# EAGLE board schemat (EAGLE 8.2.2)

Size 100 x 80 mm. Coordinates in mm from the lower left corner, seen from the top.
Outline: 0,0 100,0 100,80 0,80 0,0
Copper layers (1*16): Top 0.035mm / dielectric 1.5mm / Bottom 0.035mm
Design rules "default": minimum track width 6mil, minimum drill 0.35mm, track to track 6mil, track to pad 6mil, pad to pad 6mil, via to via 6mil, smd to smd 6mil, copper to edge 40mil, drill to drill 6mil, minimum pad ring 10mil, minimum via ring 8mil, stop-mask expansion 4mil, vias tented up to drill 0mil, thermal gap 10mil

## Footprints (pad centres in the part's own frame; a part is rotated, then mirrored left to right if it is on the bottom)
E5-4 = drill 0.813 pad 1.905: + -2.54,0 | drill 0.813 pad 1.905 octagon: - 2.54,0
C050-025X075 = drill 0.813 octagon: 1 -2.54,0; 2 2.54,0
TUXGR_16X2_R2 = drill 1 pad 1.676: 1 -32,15.5; 2 -29.46,15.5; 3 -26.92,15.5; 4 -24.38,15.5; 5 -21.84,15.5; 6 -19.3,15.5; 7 -16.76,15.5; 8 -14.22,15.5; 9 -11.68,15.5; 10 -9.14,15.5; 11 -6.6,15.5; 12 -4.06,15.5; 13 -1.52,15.5; 14 1.02,15.5; 15 3.56,15.5; 16 6.1,15.5 | hole 2.5: -37.5,-15.5; 37.5,-15.5; -37.5,15.5; 37.5,15.5
TO220H = drill 1.118 long: 1 -2.54,-10.16; 2 0,-10.16; 3 2.54,-10.16 | hole 3.302: 0,4.826
LED5MM = drill 0.813 pad 1.676 octagon: A -1.27,0; K 1.27,0
ARDUINO-NANO-3.0 = drill 1 square: J1.1 17.78,7.62 | drill 1: J1.2 15.24,7.62; J1.3 12.7,7.62; J1.4 10.16,7.62; J1.5 7.62,7.62; J1.6 5.08,7.62; J1.7 2.54,7.62; J1.8 0,7.62; J1.9 -2.54,7.62; J1.10 -5.08,7.62; J1.11 -7.62,7.62; J1.12 -10.16,7.62; J1.13 -12.7,7.62; J1.14 -15.24,7.62; J1.15 -17.78,7.62; J2.1 17.78,-7.62; J2.2 15.24,-7.62; J2.3 12.7,-7.62; J2.4 10.16,-7.62; J2.5 7.62,-7.62; J2.6 5.08,-7.62; J2.7 2.54,-7.62; J2.8 0,-7.62; J2.9 -2.54,-7.62; J2.10 -5.08,-7.62; J2.11 -7.62,-7.62; J2.12 -10.16,-7.62; J2.13 -12.7,-7.62; J2.14 -15.24,-7.62; J2.15 -17.78,-7.62 | hole 1.651: -20.32,7.62; -20.32,-7.62; 20.32,-7.62; 20.32,7.62
0204/7 = drill 0.813 octagon: 1 -3.81,0; 2 3.81,0
KEYPAD4X4 = drill 1.016 long: 1 -13.97,1.27; 2 -11.43,1.27; 3 -8.89,1.27; 4 -6.35,1.27; 5 -3.81,1.27; 6 -1.27,1.27; 7 1.27,1.27; 8 3.81,1.27
PJ-102A = drill 3 pad 4.8: RING 0.1,-3.39; RING_SW -4.6,-6.29; TIP 0.1,-9.29
FC-113 = drill 0.9 square: 1 -20.32,7.62; 2 -17.78,7.62; 3 -15.24,7.62; 4 -12.7,7.62; 5 -10.16,7.62; 6 -7.62,7.62; 7 -5.08,7.62; 8 -2.54,7.62; 9 0,7.62; 10 2.54,7.62; 11 5.08,7.62; 12 7.62,7.62; 13 10.16,7.62; 14 12.7,7.62; 15 15.24,7.62; 16 17.78,7.62; 17 17.78,2.54; 18 17.78,0; 19 17.78,-2.54; 20 17.78,-5.08
HC-SR501 = drill 0.9 square: 1 -2.54,-8.89; 2 0,-8.89; 3 2.54,-8.89
RELAY-2-SRD = drill 1 square: J1.1 21.59,11.43; J2.1 21.59,-11.43 | drill 1: J1.2 21.59,8.89; J1.3 21.59,6.35; J1.4 21.59,3.81; J2.2 21.59,-8.89; J2.3 21.59,-6.35 | hole 3: -22.225,16.51; 22.225,16.51; 22.225,-16.51; -22.225,-16.51
SUN = smd 2.54 x 2.54: P$1 0,0 | smd 0.305 x 1.27: P$2 0,2.54; P$3 0,-2.54 | smd 1.27 x 0.305: P$4 2.54,0; P$5 -2.54,0 | smd 1.27 x 0.305 rotated 45: P$6 2.032,1.778 | smd 1.27 x 0.305 rotated 135: P$7 2.032,-1.778 | smd 1.27 x 0.305 rotated 225: P$8 -2.032,-1.778 | smd 1.27 x 0.305 rotated 315: P$9 -2.032,1.778

## Placement (x,y rotation side)
C1  0.33u  [E5-4]  -62.23,182.88 0 top  (outside the outline)
C2  0.1u  [C050-025X075]  -29.21,182.88 0 top  (outside the outline)
DIS1  TUXGR_16X2_R2  [TUXGR_16X2_R2]  -53.34,106.68 0 top  (outside the outline)
IC1  7805T  [TO220H]  -142.24,165.1 0 top  (outside the outline)
LED1  GREEN  [LED5MM]  -43.18,182.88 0 top  (outside the outline)
M1  ARDUINO-NANO-3.0  [ARDUINO-NANO-3.0]  -110.49,165.1 0 top  (outside the outline)
R1  480  [0204/7]  -71.12,181.61 0 top  (outside the outline)
U$1  [KEYPAD4X4]  -40.64,82.55 0 top  (outside the outline)
U$2  2.1MMJACKTHM  [PJ-102A]  7.62,124.46 0 top  (outside the outline)
U$3  FC-113  [FC-113]  -114.3,101.6 0 top  (outside the outline)
U$4  HC-SR501  [HC-SR501]  -33.02,138.43 0 top  (outside the outline)
U$5  HC-SR501  [HC-SR501]  -71.12,138.43 0 top  (outside the outline)
U$6  HC-SR501  [HC-SR501]  -109.22,138.43 0 top  (outside the outline)
U$7  HC-SR501  [HC-SR501]  -33.02,165.1 0 top  (outside the outline)
U$8  HC-SR501  [HC-SR501]  -71.12,165.1 0 top  (outside the outline)
U$9  RELAY-2-SRD  [RELAY-2-SRD]  -104.14,22.86 0 top  (outside the outline)
U$10  SUNLOGO  [SUN]  -50.8,182.88 0 top  (outside the outline)

## Library data of the parts
C1 C2 R1 = resistor
DIS1 = display-lcd; OC_FARNELL: unknown; OC_NEWARK: unknown
IC1 LED1 U$2 U$10 = adafruit
M1 U$9 = diy-modules
U$1 = keypad4x4_ece
U$3-U$8 = brakujace_alarm

## Nets
3V3: M1.J2.14
5V: M1.J2.4
+5V: C2.1 IC1.3 U$3.18 U$4.1 U$5.1 U$6.1 U$7.1 U$8.1 U$9.J1.1
GND: C1.- C2.2 IC1.2 LED1.K M1.J1.4 M1.J2.2 U$2.RING U$2.RING_SW U$3.17 U$4.3 U$5.3 U$6.3 U$7.3 U$8.3 U$9.J1.4
KEY1: M1.J1.7 U$1.1
KEY2: M1.J1.8 U$1.2
KEY3: M1.J1.9 U$1.3
KEY4: M1.J1.10 U$1.4
KEY5: M1.J1.11 U$1.5
KEY6: M1.J1.12 U$1.6
KEY7: M1.J1.13 U$1.7
KEY8: M1.J1.14 U$1.8
N$1: DIS1.15 U$3.15
N$2: LED1.A R1.2
N$5: DIS1.1 U$3.1
N$6: DIS1.2 U$3.2
N$7: DIS1.3 U$3.3
N$8: DIS1.4 U$3.4
N$9: DIS1.5 U$3.5
N$10: DIS1.6 U$3.6
N$11: DIS1.7 U$3.7
N$12: DIS1.8 U$3.8
N$13: DIS1.9 U$3.9
N$14: DIS1.10 U$3.10
N$15: DIS1.11 U$3.11
N$16: DIS1.12 U$3.12
N$17: DIS1.13 U$3.13
N$18: DIS1.14 U$3.14
N$20: DIS1.16 U$3.16
N$30: U$9.J2.1 U$9.J2.2
PIR1: M1.J2.10 U$4.2
PIR2: M1.J1.2 U$5.2
PIR3: M1.J1.1 U$6.2
PIR4: M1.J1.5 U$7.2
PIR5: M1.J1.6 U$8.2
RELAY1: M1.J2.12 U$9.J1.3
SCL: M1.J2.7 U$3.20
SDA: M1.J2.8 U$3.19
VCC: C1.+ IC1.1 M1.J2.1 R1.1 U$2.TIP

## Tracks (layer width: path | path; a pad name or v marks a point on that pad's centre or on a via)
+5V  (8 unrouted)
GND  (14 unrouted)
KEY1  (1 unrouted)
KEY2  (1 unrouted)
KEY3  (1 unrouted)
KEY4  (1 unrouted)
KEY5  (1 unrouted)
KEY6  (1 unrouted)
KEY7  (1 unrouted)
KEY8  (1 unrouted)
N$1  (1 unrouted)
N$2  (1 unrouted)
N$5  (1 unrouted)
N$6  (1 unrouted)
N$7  (1 unrouted)
N$8  (1 unrouted)
N$9  (1 unrouted)
N$10  (1 unrouted)
N$11  (1 unrouted)
N$12  (1 unrouted)
N$13  (1 unrouted)
N$14  (1 unrouted)
N$15  (1 unrouted)
N$16  (1 unrouted)
N$17  (1 unrouted)
N$18  (1 unrouted)
N$20  (1 unrouted)
N$30  (1 unrouted)
PIR1  (1 unrouted)
PIR2  (1 unrouted)
PIR3  (1 unrouted)
PIR4  (1 unrouted)
PIR5  (1 unrouted)
RELAY1  (1 unrouted)
SCL  (1 unrouted)
SDA  (1 unrouted)
VCC  (4 unrouted)